# Allegro board DMX_transceiver.brd
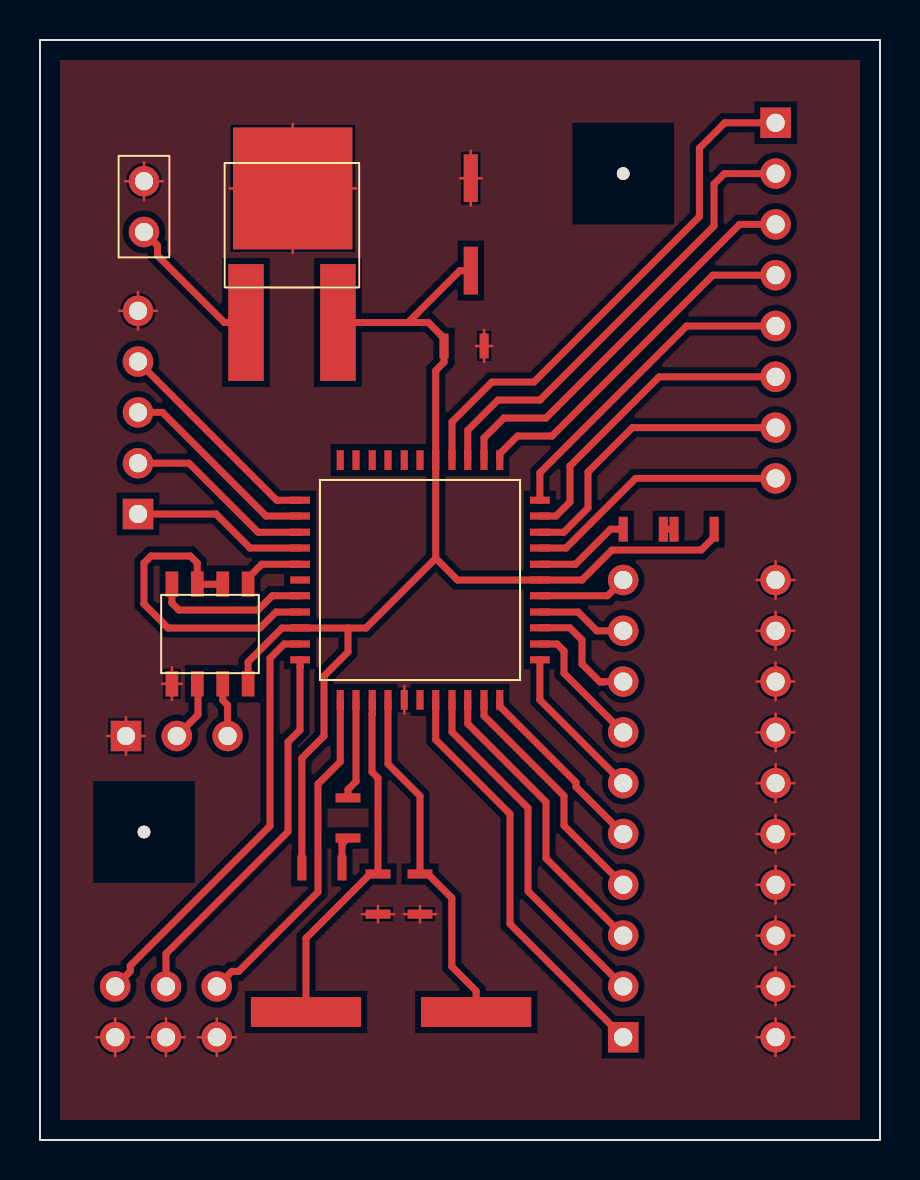
[diagram p0: board, top side]
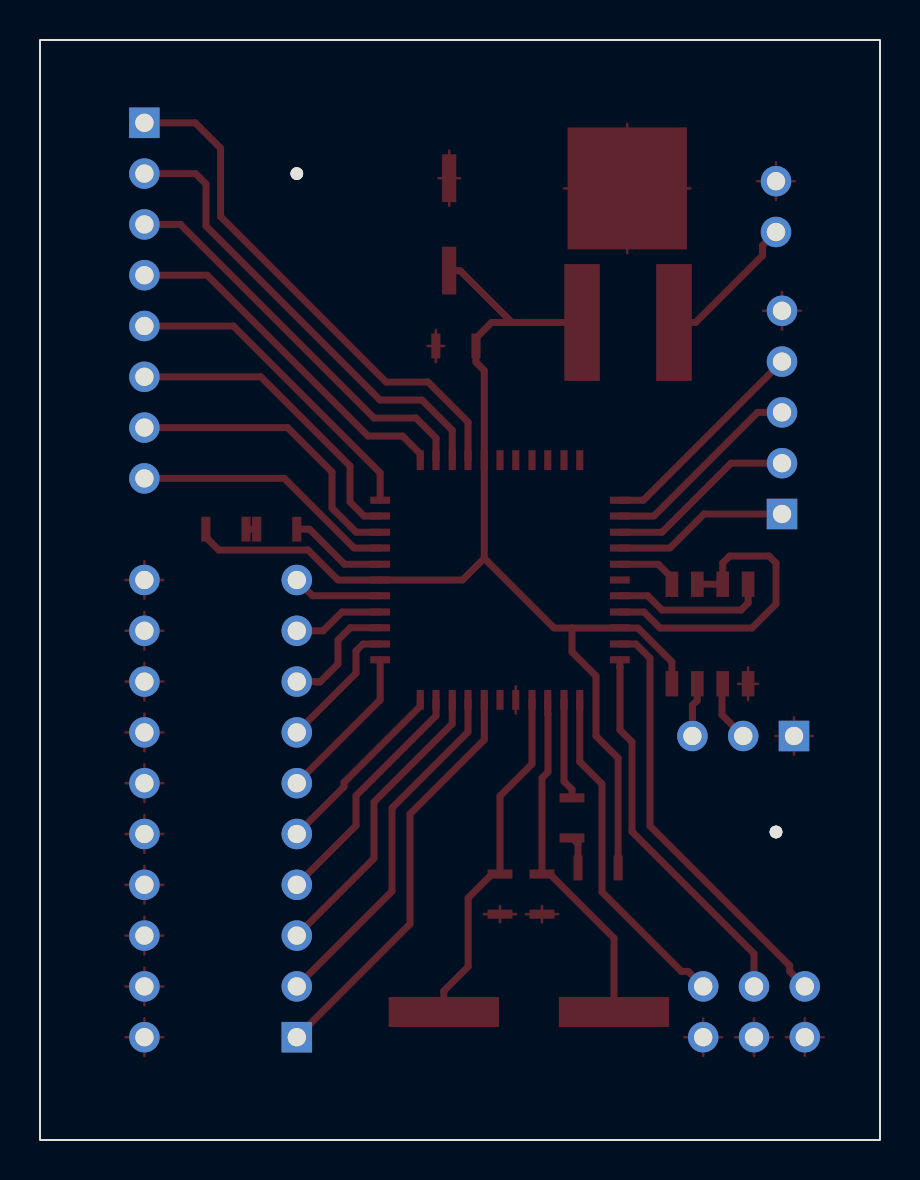
[diagram p1: board, bottom side, seen from below]

Outline 42 x 55 mm; copper layers: TOP, BOTTOM. Coordinates in mm from the lower left corner of the outline.
Outline path: rectangle 0,0 42,55

## Placement (name value [footprint] x y rotation side)
C1  27pF  [FG0805C]  16.9 13.3 270 top
C2  27pF  [FG0805C]  19 13.3 270 top
C6  100uF  [FGCAP6377]  21.54 45.78 0 top
C7  100nF  [FG0805C]  20.2 39.7 0 top
J1  POWER  [JUMPER2]  5.2 45.4 90 top
J2  ADRESS  [FGDIP10]  29.16 5.14 180 bottom
J3  JUMPER3  [FGJUMPER3]  3.76 7.68 270 top
J4  ISP  [FGCONN5]  4.9 31.3 0 top
J5  OUT  [FGCONN8]  36.78 50.86 180 top
J6  DMX  [FGCONN3]  4.3 20.2 270 top
LED1  RED  [FG0805R]  15.1 13.6 180 top
LED2  GREEN  [FG0805R]  31.7 30.54 0 top
MC1  ATMEGA8515-16AU  [TQFP44]  19 28 0 top
NOREF  -  [unnamed]  29.16 48.32 0 top
NOREF#2  -  [unnamed]  5.2 15.4 0 top
R2  390  [FG0805R]  15.4 15.1 90 top
R3  390  [FG0805R]  29.16 30.54 0 top
U1  78HT2  [TO252AA]  10.3 40.9 0 top
U2  75176  [SO8]  8.5 25.3 270 top
Y1  8MHz  [FGXTAL]  13.3 6.4 0 top

## Library data of the parts
C1 C2 C7 = CAP NP
C6 = CAP
J1 = CON2: User Part Number: ***
J2 = JUMPER10
J3 = JUMPER3: User Part Number: ***
J4 = CON5
J5 = CON8
J6 = CON3
LED1 LED2 = LED
MC1 = ATMEGA8515-16AU_0
R2 R3 = RESISTOR
U1 = 78HT2
U2 = 75176
Y1 = CRYSTAL

## Footprints (pads in the part's own frame, mm; a bottom-side part is the same pattern mirrored in y, then rotated)
FG0805C
  rect 0.457x1.245 smd: 1(0,0) 2(2.007,0)
FG0805R
  rect 0.457x1.245 smd: 1(0,0) 2(2.007,0)
FGCAP6377
  rect 0.711x2.388 smd: 1(0,-2.311) 2(0,2.311)
FGCONN3
  rect 1.524x1.524 hole 0.914: 1(0,0)
  round 1.524 hole 0.914: 2(0,2.54) 3(0,5.08)
FGCONN5
  rect 1.524x1.524 hole 0.914: 1(0,0)
  round 1.524 hole 0.914: 2(0,2.54) 3(0,5.08) 4(0,7.62) 5(0,10.16)
FGCONN8
  rect 1.524x1.524 hole 0.914: 1(0,0)
  round 1.524 hole 0.914: 2(0,2.54) 3(0,5.08) 4(0,7.62) 5(0,10.16) 6(0,12.7) 7(0,15.24) 8(0,17.78)
FGDIP10
  rect 1.524x1.524 hole 0.914: 1(0,0)
  round 1.524 hole 0.914: 2(-7.62,0) 3(0,2.54) 4(-7.62,2.54) 5(0,5.08) 6(-7.62,5.08) 7(0,7.62) 8(-7.62,7.62) 9(0,10.16) 10(-7.62,10.16) 11(0,12.7) 12(-7.62,12.7) 13(0,15.24) 14(-7.62,15.24) 15(0,17.78) 16(-7.62,17.78) 17(0,20.32) 18(-7.62,20.32) 19(0,22.86) 20(-7.62,22.86)
FGJUMPER3
  round 1.524 hole 0.914: 1(0,0) 2(2.54,0) 3(0,2.54) 4(2.54,2.54) 5(0,5.08) 6(2.54,5.08)
FGXTAL
  rect 5.512x1.499 smd: 1(0,0) 2(8.509,0)
JUMPER2
  round 1.524 hole 0.914: 1(0,0) 2(2.54,0)
SO8
  rect 1.27x0.635 smd: 1(-2.489,1.905) 2(-2.489,0.635) 3(-2.489,-0.635) 4(-2.489,-1.905) 5(2.489,-1.905) 6(2.489,-0.635) 7(2.489,0.635) 8(2.489,1.905)
TO252AA
  rect 1.778x5.842 smd: 1(0,-0.025) 3(4.597,-0.025)
  rect 5.969x6.096 smd: 2(2.337,6.68)
TQFP44
  rect 0.991x0.356 smd: 1(-5.994,3.988) 2(-5.994,3.2) 3(-5.994,2.388) 4(-5.994,1.6) 5(-5.994,0.787) 6(-5.994,0) 7(-5.994,-0.787) 8(-5.994,-1.6) 9(-5.994,-2.388) 10(-5.994,-3.2) 11(-5.994,-3.988) 23(5.994,-3.988) 24(5.994,-3.2) 25(5.994,-2.388) 26(5.994,-1.6) 27(5.994,-0.787) 28(5.994,0) 29(5.994,0.787) 30(5.994,1.6) 31(5.994,2.388) 32(5.994,3.2) 33(5.994,3.988)
  rect 0.356x0.991 smd: 12(-3.988,-5.994) 13(-3.2,-5.994) 14(-2.388,-5.994) 15(-1.6,-5.994) 16(-0.787,-5.994) 17(0,-5.994) 18(0.787,-5.994) 19(1.6,-5.994) 20(2.388,-5.994) 21(3.2,-5.994) 22(3.988,-5.994) 34(3.988,5.994) 35(3.2,5.994) 36(2.388,5.994) 37(1.6,5.994) 38(0.787,5.994) 39(0,5.994) 40(-0.787,5.994) 41(-1.6,5.994) 42(-2.388,5.994) 43(-3.2,5.994) 44(-3.988,5.994)
unnamed
  round 0.635 hole 3.175 unplated: (0,0)

## Nets
GND: C1.2 C2.2 C6.2 C7.2 J1.2 J2.2 J2.4 J2.6 J2.8 J2.10 J2.12 J2.14 J2.16 J2.18 J2.20 J3.2 J3.4 J3.6 J4.5 J6.1 MC1.16(GND) U1.2 U2.5
VCC: C6.1 C7.1 LED1.2(ANODE) LED2.2(ANODE) MC1.9(PD3 (INT1)) MC1.28(NC*3) MC1.38(VCC) U1.3(VOUT) U2.8
N00470: J1.1 U1.1(VIN)
N00531: MC1.29(PE0 (ICP/INT2)) R3.1
N00560: LED2.1(CATHODE) R3.2
N00638: MC1.13(PD7 (RD)) R2.2
N00658: LED1.1(CATHODE) R2.1
N00937: J2.9 MC1.22(PC4 (A12))
N00946: J2.1 MC1.18(PC0 (A8))
N00953: J2.3 MC1.19(PC1 (A9))
N00960: J2.5 MC1.20(PC2 (A10))
N00967: J2.7 MC1.21(PC3 (A11))
N00974: J2.11 MC1.23(PC5 (A13))
N00981: J2.13 MC1.24(PC6 (A14))
N00993: J2.15 MC1.25(PC7 (A15))
N01011: J2.17 MC1.26(PE2 (OC1B))
N01024: J2.19 MC1.27(PE1 (ALE))
N01116: J3.5 MC1.12(PD6 (WR))
N01128: J3.1 MC1.10(PD4 (XCK))
N01140: J3.3 MC1.11(PD5 (OC1A))
N01294: MC1.8(PD2 (INT0)) U2.2(RE) U2.3(DE)
N01361: MC1.5(PD0 (RXD)) U2.1(R)
N01374: MC1.7(PD1 (TXD)) U2.4(D)
N01592: J4.1 MC1.4(RESET)
N01601: J4.2 MC1.3(PB7 (SCK))
N01613: J4.3 MC1.2(PB6 (MISO))
N01625: J4.4 MC1.1(PB5 (MOSI))
N01745: J5.8 MC1.30(PA7 (AD7))
N01767: J5.7 MC1.31(PA6 (AD6))
N01805: J5.6 MC1.32(PA5 (AD5))
N01817: J5.5 MC1.33(PA5 (AD4))
N01824: J5.4 MC1.34(PA3 (AD3))
N01833: J5.3 MC1.35(PA2 (AD2))
N01840: J5.2 MC1.36(PA1 (AD1))
N01847: J5.1 MC1.37(PA0 (AD0))
N02262: J6.3 U2.7(B)
N02266: J6.2 U2.6(A)
N02401: C1.1 MC1.14(XTAL1) Y1.1
N02413: C2.1 MC1.15(XTAL2) Y1.2

Pads without a net: MC1 6 17 39 40 41 42 43 44

## Routing (per net, layer and track width the routed paths; a pad name or vN(x,y) marks a point on that pad's centre or on a via; arc(x,y) is an arc through that point)
GND: length 88.1
  TOP w0.127: U1.2 15.8,47.58 ; U1.2 9.47,47.58 ; U1.2 12.64,50.81 ; U1.2 12.64,44.35 ; J3.4 7.24,5.14 ; J3.4 5.36,5.14 ; J3.4 6.3,4.2 ; J3.4 6.3,6.08 ; 3.36,20.2 J6.1 ; J6.1 4.3,19.26 ; J6.1 5.24,20.2 ; J6.1 4.3,21.14 ; C7.2 22.62,39.7 ; C7.2 22.21,40.5 ; C7.2 22.21,38.9 ; C7.2 21.8,39.7 ; 21,48.09 C6.2 ; C6.2 22.08,48.09 ; C6.2 21.54,46.72 ; C6.2 21.54,49.47 ; J3.6 9.78,5.14 ; J3.6 8.84,6.08 ; J3.6 7.9,5.14 ; J3.6 8.84,4.2 ; 35.84,22.92 J2.16 ; J2.16 36.78,23.86 ; J2.16 36.78,21.98 ; J2.16 37.72,22.92 ; J2.18 37.72,25.46 ; J2.18 36.78,26.4 ; J2.18 35.84,25.46 ; J2.18 36.78,24.52 ; 4.9,40.52 J4.5 ; J4.5 4.9,42.4 ; J4.5 3.96,41.46 ; J4.5 5.84,41.46 ; 6.59,22 U2.5 ; U2.5 6.59,23.63 ; U2.5 6.1,22.81 ; U2.5 7.09,22.81 ; J3.2 4.7,5.14 ; J3.2 3.76,6.08 ; J3.2 2.82,5.14 ; J3.2 3.76,4.2 ; 16.1,11.29 16.9,11.29 ; 16.9,11.29 16.9,11.7 ; 16.9,11.29 17.7,11.29 ; 16.9,11.29 16.9,10.88 ; J2.6 37.72,10.22 ; J2.6 36.78,9.28 ; J2.6 35.84,10.22 ; J2.6 36.78,11.16 ; 36.78,14.36 J2.10 ; J2.10 35.84,15.3 ; J2.10 37.72,15.3 ; J2.10 36.78,16.24 ; 36.78,11.82 J2.8 ; J2.8 37.72,12.76 ; J2.8 36.78,13.7 ; J2.8 35.84,12.76 ; J2.4 37.72,7.68 ; J2.4 36.78,8.62 ; J2.4 36.78,6.74 ; J2.4 35.84,7.68 ; 19,11.29 19,11.7 ; 19,11.29 19,10.88 ; 19,11.29 18.2,11.29 ; 19,11.29 19.8,11.29 ; J2.14 37.72,20.38 ; J2.14 36.78,19.44 ; J2.14 35.84,20.38 ; J2.14 36.78,21.32 ; 35.84,17.84 J2.12 ; J2.12 37.72,17.84 ; J2.12 36.78,18.78 ; J2.12 36.78,16.9 ; J2.20 36.78,28.94 ; J2.20 36.78,27.06 ; J2.20 37.72,28 ; J2.20 35.84,28 ; J1.2 6.14,47.94 ; J1.2 5.2,48.88 ; J1.2 5.2,47 ; J1.2 4.26,47.94 ; J2.2 37.72,5.14 ; J2.2 35.84,5.14 ; J2.2 36.78,6.08 ; J2.2 36.78,4.2 ; 18.21,22.68 MC1.16 18.21,21.33
VCC: length 62.3
  TOP w0.35: 19.79,29.09 20.87,28 MC1.28 27.1,28 28.6,29.5 33.06,29.5 33.71,30.15 LED2.2 ; 19.79,29.09 MC1.38 19.79,38.47 20.2,38.89 C7.1 20.2,40.09 19.42,40.88 18.4,40.88 ; 19.79,29.09 16.3,25.6 15.4,25.6 ; LED1.2 13.09,19.09 14.2,20.2 14.2,23.2 15.4,24.4 15.4,25.6 ; U2.8 10.4,23.91 12.1,25.6 15.4,25.6 ; 18.4,40.88 14.9,40.88 ; 18.4,40.88 20.99,43.47 C6.1
N00470: length 7.3
  TOP w0.35: U1.1 9.22,40.88 5.87,44.22 5.87,44.73 J1.1
N00531: length 4.9
  TOP w0.35: R3.1 28.52,30.54 26.77,28.79 MC1.29
N00560: length 0.5
  TOP w0.35: R3.2 LED2.1
N00638: length 5.1
  TOP w0.35: R2.2 15.4,17.53 15.8,17.93 MC1.13
N00658: length 1.6
  TOP w0.35: R2.1 15.1,14.8 LED1.1
N00937: length 9.3
  TOP w0.35: J2.9 26.8,17.66 26.8,17.88 22.99,21.69 MC1.22
N00946: length 20.7
  TOP w0.35: J2.1 23.5,10.8 23.5,16.3 19.79,20.01 MC1.18
N00953: length 17.9
  TOP w0.35: J2.3 24.4,12.44 24.4,16.6 20.6,20.4 MC1.19
N00960: length 15
  TOP w0.35: J2.5 25.3,14.08 25.3,16.9 21.39,20.81 MC1.20
N00967: length 12.1
  TOP w0.35: J2.7 26.2,15.72 26.2,17.21 22.2,21.21 MC1.21
N00974: length 7.9
  TOP w0.35: MC1.23 24.99,22.01 J2.11
N00981: length 6.6
  TOP w0.35: MC1.24 25.85,24.8 26.2,24.45 26.2,23.34 J2.13
N00993: length 6
  TOP w0.35: J2.15 28.21,22.92 28.19,22.9 28,22.9 27.1,23.8 27.1,25 26.49,25.61 MC1.25
N01011: length 4.6
  TOP w0.35: MC1.26 26.9,26.4 27.84,25.46 J2.17
N01024: length 4.5
  TOP w0.35: J2.19 28.37,27.21 MC1.27
N01116: length 17.1
  TOP w0.35: MC1.12 15.01,18.91 13.9,17.8 13.9,12.4 9.93,8.43 9.59,8.43 J3.5
N01128: length 21.4
  TOP w0.35: MC1.10 12.21,24.8 11.5,24.09 11.5,15.7 4.51,8.71 4.51,8.43 J3.1
N01140: length 19.1
  TOP w0.35: MC1.11 13.01,23.64 13,23.64 13,20.5 12.4,19.9 12.4,15.41 6.3,9.31 J3.3
N01294: length 16
  TOP w0.35: U2.2 U2.3 7.87,28.85 7.51,29.2 5.55,29.2 5.2,28.85 5.2,26.8 6.4,25.6 11,25.6 11.8,26.4 MC1.8
N01361: length 3.2
  TOP w0.35: U2.1 10.4,28.11 11.09,28.79 MC1.5
N01374: length 7.8
  TOP w0.35: MC1.7 11.61,27.21 10.9,26.5 6.95,26.5 6.59,26.85 U2.4
N01592: length 8.8
  TOP w0.35: J4.1 8.8,31.3 10.5,29.6 MC1.4
N01601: length 9.5
  TOP w0.35: MC1.3 10.9,30.39 7.45,33.84 J4.2
N01613: length 10.3
  TOP w0.35: MC1.2 11.3,31.2 6.12,36.38 J4.3
N01625: length 11
  TOP w0.35: J4.4 11.83,31.99 MC1.1
N01745: length 13.2
  TOP w0.35: MC1.30 26.3,29.6 29.78,33.08 J5.8
N01767: length 15
  TOP w0.35: J5.7 29.62,35.62 27.4,33.4 27.4,31.6 26.19,30.39 MC1.31
N01805: length 15.7
  TOP w0.35: MC1.32 25.8,31.2 26.5,31.9 26.5,33.7 30.96,38.16 J5.6
N01817: length 16.2
  TOP w0.35: J5.5 32.34,40.7 24.99,33.36 MC1.33
N01824: length 17.8
  TOP w0.35: J5.4 33.64,43.24 25.6,35.2 23.88,35.2 22.99,34.31 MC1.34
N01833: length 20.1
  TOP w0.35: J5.3 34.98,45.78 25.3,36.1 23.2,36.1 22.2,35.1 MC1.35
N01840: length 23.4
  TOP w0.35: MC1.36 21.39,35.49 22.9,37 25,37 33.7,45.7 33.7,47.8 34.22,48.32 J5.2
N01847: length 26.3
  TOP w0.35: MC1.37 20.6,35.9 22.6,37.9 24.7,37.9 32.97,46.17 32.97,49.59 34.24,50.86 J5.1
N02262: length 2.7
  TOP w0.35: J6.3 9.38,21.74 9.13,21.98 U2.7
N02266: length 3.1
  TOP w0.35: J6.2 7.9,21.26 7.9,22.78 U2.6
N02401: length 17.5
  TOP w0.35: MC1.14 16.61,21.32 16.6,21.31 16.6,18.4 16.9,18.1 C1.1 16.51,13.3 13.3,10.09 Y1.1
N02413: length 17.7
  TOP w0.35: Y1.2 21.81,7.45 20.59,8.67 20.59,12.1 19.39,13.3 C2.1 19,17.2 17.4,18.8 MC1.15

## Copper pours and planes (outline as drawn; the poured copper is in the pictures)
GND on TOP: 1,1 1,54 41,54 41,1
